# Altium PCB 8POS Dura-Clik Breakout.PcbDoc
Units mm, origin at the board's own origin, x right, y up, seen from the top; angles counter-clockwise.
Board outline 20 x 40 mm, 2 copper layers (Top Layer, Bottom Layer); 1 components, 0 nets, 22 pads, 0 vias.
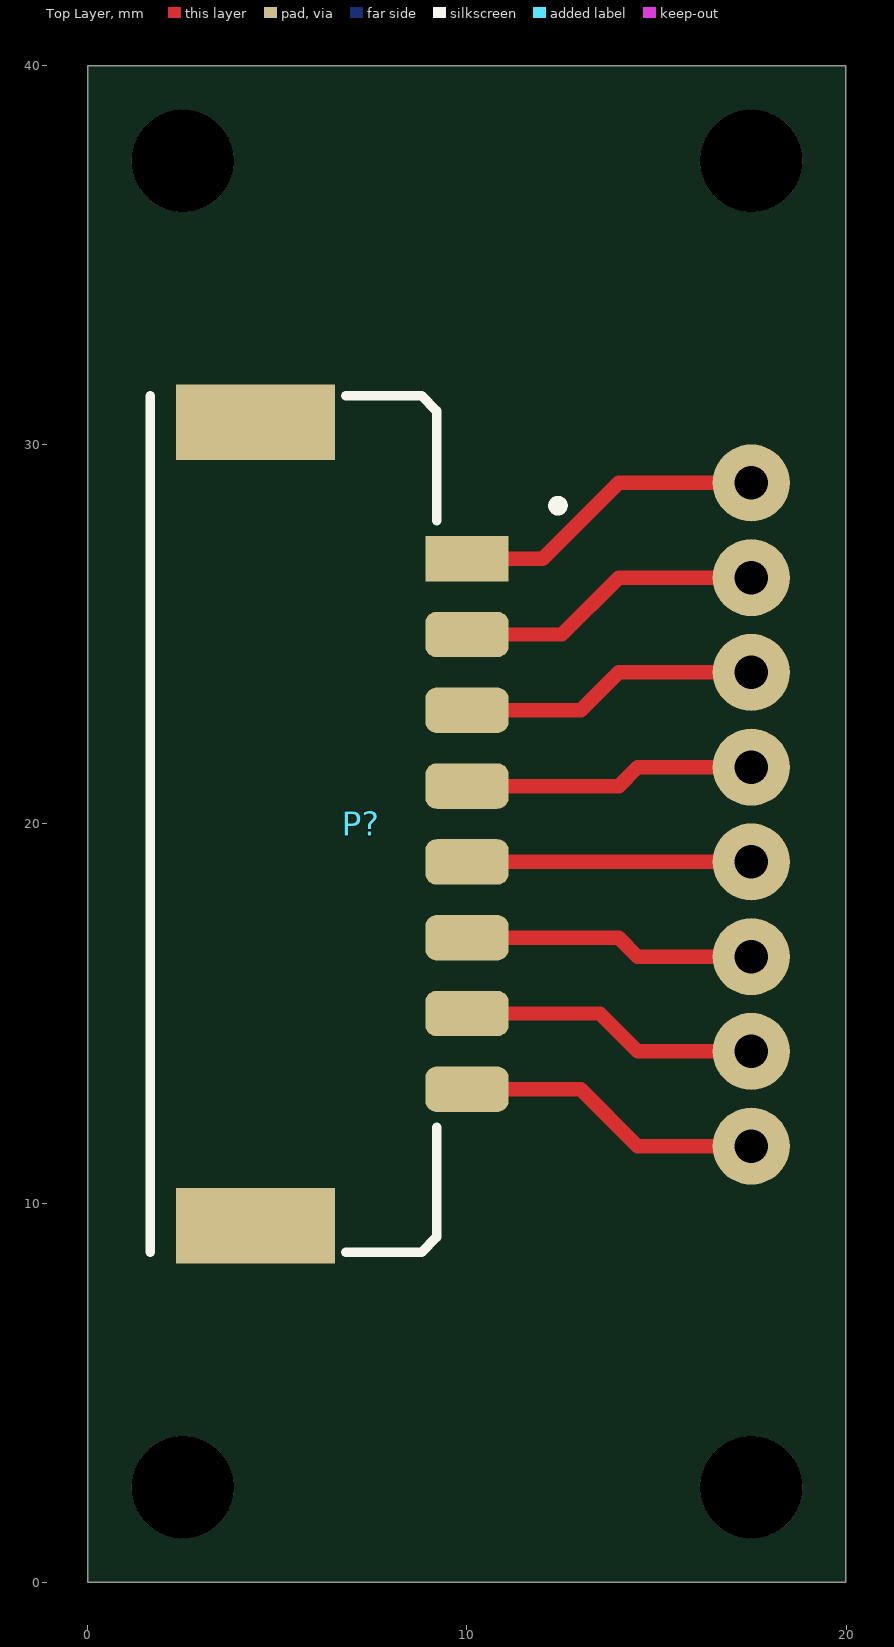
[diagram p0: Top Layer view]
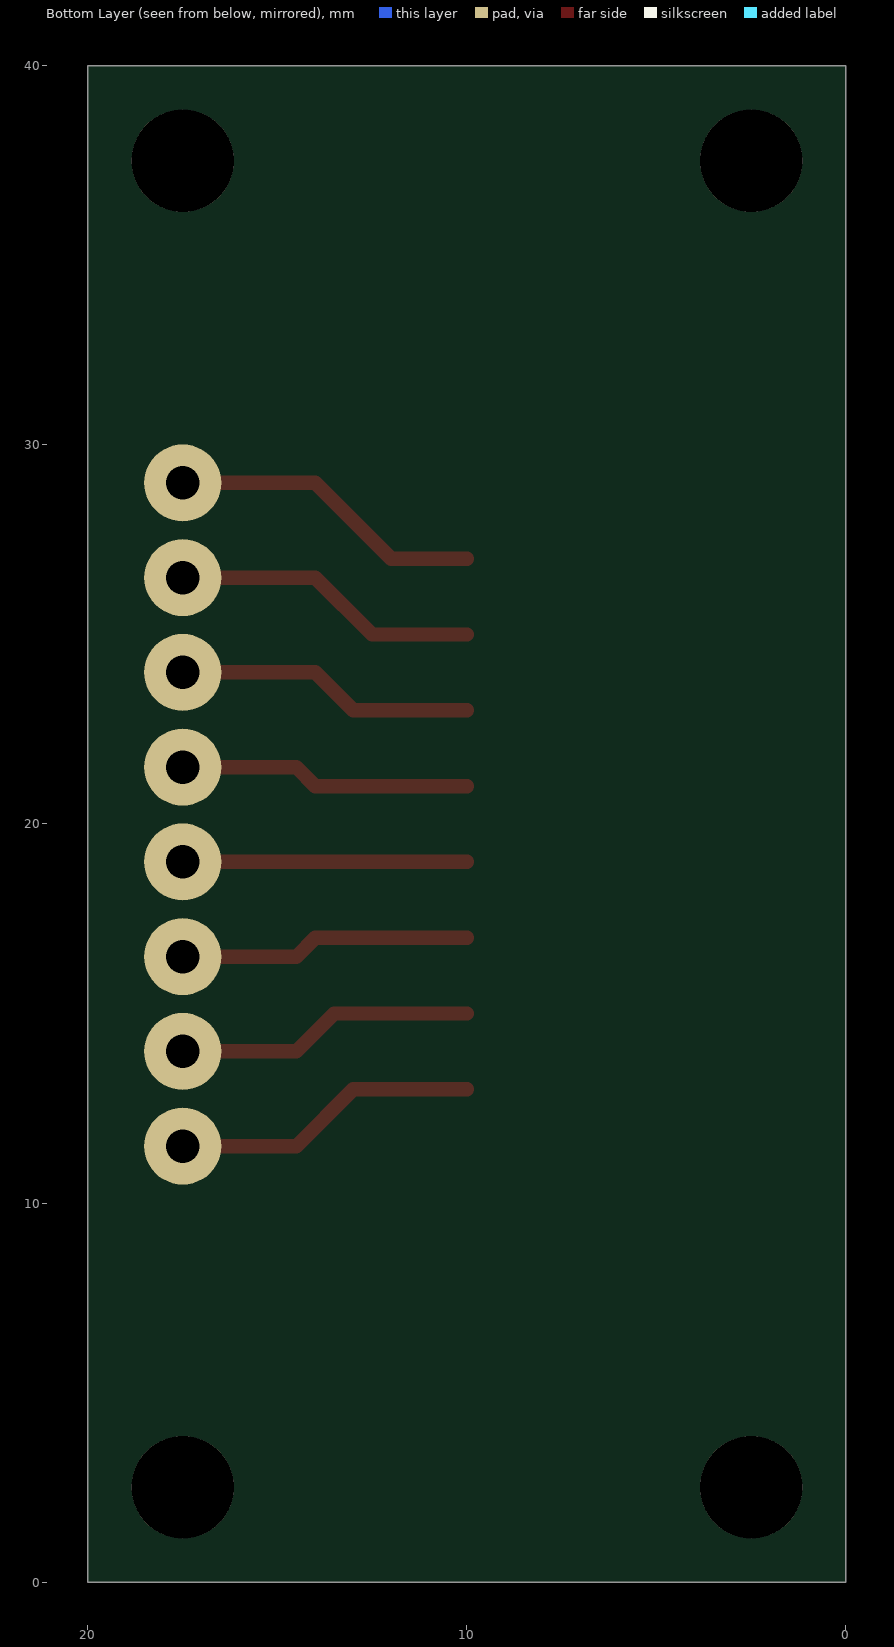
[diagram p1: Bottom Layer view, seen from below]

## Layer stack, top to bottom
Top Solder: solder mask 0.0102, Solder Resist, Dk 3.5
Top Layer: signal copper 0.0356
Dielectric 1: dielectric 0.32, FR-4, Dk 4.8
Bottom Layer: signal copper 0.0356
Bottom Solder: solder mask 0.0102, Solder Resist, Dk 3.5

## Board outline
0,0 0,40 20,40 20,0

## Design rules (kind name [scope] priority, off if disabled: settings)
BoardOutlineClearance [All] p1: gap=0.406 ignorepadtopadclearanceinfootprint=FALSE
Clearance [All] p1: gap=0.152 ignorepadtopadclearanceinfootprint=FALSE except(0: Arc-Hole Track-Hole SMDPad-Hole THPad-Hole Via-Hole Fill-Hole Poly-Hole Region-Hole Text-Hole)
ComponentClearance ComponentClearance_ControllerBoard [InComponent('P1') vs Identifier = 'Controller-Board'] p1: gap=0 collisioncheckmode=3 verticalgap=0 showdistances=FALSE
ComponentClearance ComponentClearance_Standoffs [Identifier = 'Standoff' vs Identifier = 'Controller-Board'] p2: gap=0 collisioncheckmode=3 verticalgap=0 showdistances=FALSE
ComponentClearance [All] p3: gap=0.254 collisioncheckmode=3 verticalgap=0.254 showdistances=FALSE
HoleSize [All] p1: absolutevalues=TRUE maxlimit=6.3 minlimit=0.3 maxpercent=80.000 minpercent=20.000
MinimumAnnularRing [All] p1: minimumring=0.152
MinimumSolderMaskSliver [All] p1: minsoldermaskwidth=0.3
PolygonConnect [IsPad] p1: connectstyle=Relief reliefconductorwidth=0.254 reliefentries=4 polygonreliefangle="90 Angle" airgapwidth=0.254
PolygonConnect PolygonConnect_NoThermal [Not(IsPad)] p2: connectstyle=Direct reliefconductorwidth=0.254 reliefentries=4 polygonreliefangle="90 Angle" airgapwidth=0.254
RoutingVias [All] p1: holewidth=0.3 width=0.6 viastyle="Through Hole" minholewidth=0.3 minwidth=0.6 maxholewidth=0.711 maxwidth=1.27
SilkToSolderMaskClearance [IsPad] p1: minsilkscreentomaskgap=0.178 clearancetoexposedcopper=TRUE
SolderMaskExpansion [All] p1: expansion=0.102
Width [All] p1: maxlimit=2.54 minlimit=0.152 preferedwidth=0.254
26 further rules are at their usual default settings.

## Components (designator, comment, footprint, x,y, rotation, side; value= is the part's Value field where it differs from the comment)
P? "CONN 8POS DURA-CLIK 0.079\"" "CONN, 8POS Dura-Clik" 10,27 r270 top

## Footprints (in the part's own frame and the unit in brackets; to place one, negate y for a bottom-side part, rotate by r counter-clockwise, add the part's x,y. Pads: shape width x height; smd on the part's side, far side on the other; paste and mask are expansions set on the pad)
"CONN, 8POS Dura-Clik" [mm] "WM10868CT-ND"
  rect 1.2x2.2 smd: 1(0,0)
  rrect50% 1.2x2.2 smd: 2(2,0) 3(4,0) 4(6,0) 5(8,0) 6(10,0) 7(12,0) 8(14,0)
  rect 2x4.2 smd: ""(-3.6,-5.58) ""(17.6,-5.58)
  silkscreen extent -4.3,-8.36 18.3,2.53, body extent -4.3,-8.36 18.3,0.79, height 8.02

## Part data
P?: "8 Positions Header Connector 0.079\" (2.00mm) Surface Mount Tin", Current Rating=-, Insulation Color=Natural, Manufacturer 1="Molex, LLC", Manufacturer Part Number 1=5600200820, Supplier Part Number 1=WM10868CT-ND, ComponentLink1Description=http://www.molex.com/pdm_docs/sd/5600200820_sd.pdf, ComponentLink1URL=http://www.molex.com/pdm_docs/sd/5600200820_sd.pdf, Connector Type=Header, Contact Finish - Mating=Tin, Contact Finish - Post=Tin, Contact Finish Thickness - Mating=-, Contact Finish Thickness - Post=-, Contact Length - Mating=-, Contact Length - Post=-, Contact Material="Copper Alloy", Contact Shape=Square, Contact Type="Male Pin", Fastening Type="Latch Lock", Ingress Protection=-, Insulation Height="0.315\" (8.00mm)", Insulation Material="Polyamide (PA), Nylon", Mated Stacking Heights=9.3mm, Material Flammability Rating=-, Mounting Type="Surface Mount", Number of Positions=8, Number of Positions Loaded=All, Number of Rows=1, Operating Temperature=-, Overall Contact Length=-, Packaging="Cut Tape (CT)", Part Status=Active, Pitch - Mating="0.079\" (2.00mm)", Row Spacing - Mating=-, Series=DuraClik, Shrouding="Shrouded - 4 Wall", Style="Board to Cable/Wire", Supplier 1=Digi-Key, Termination=Solder, Voltage=-

## Free pads (board coordinates)
  round 2.032 hole 0.889: 1(17.5,29) 2(17.5,26.5) 3(17.5,24) 4(17.5,21.5) 5(17.5,19) 6(17.5,16.5) 7(17.5,14) 8(17.5,11.5)
  round 2.7 hole 2.7: ""(2.5,2.5) ""(2.5,37.5) ""(17.5,2.5) ""(17.5,37.5)

## Nets (pads, with @x,y where several pads share a name; then routed paths per layer and width w, separated by ;. In a path a pad name is that pad's centre, name@x,y a point inside that pad or via, vN(x,y) a via of type N, cw(c..) or ccw(c..) an arc to the next point about the centre after c; other vN are vias at no path point)
pads on no net: P?. P?.1 P?.2 P?.3 P?.4 P?.5 P?.6 P?.7 P?.8
copper on no net: | length 63.3
  Top Layer w0.381: 10,13 13,13 14.5,11.5 17.5,11.5 ; 10,15 13.5,15 14.5,14 17.5,14 ; 10,17 14,17 14.5,16.5 17.5,16.5 ; 10,19 17.5,19 ; 10,21 14,21 14.5,21.5 17.5,21.5 ; 10,23 13,23 14,24 17.5,24 ; 10,25 12.5,25 14,26.5 17.5,26.5 ; 10,27 12,27 14,29 17.5,29

## Polygon pours and split planes (outlines as drawn)
no net on Top Layer "NONET_L01_P000" (solid, shelved, pour order 0): -2.5,53.5 -2.5,-1.5 52.5,-1.5 52.5,53.5
no net on Bottom Layer "COMPONENT_SIDE_NONET_P-001" (solid, shelved, pour order 2): -2.5,53.5 -2.5,-1.5 52.5,-1.5 52.5,53.5